# Altium PCB Nixie Valve Clock.PcbDoc (part 3 of 3)
Units mm, origin at the board's own origin, x right, y up, seen from the top; angles counter-clockwise.
Board outline 55 x 181 mm, 2 copper layers (Top Layer, Bottom Layer), stack 1.57 mm thick; 131 components, 140 nets, 506 pads, 541 vias.
Unrouted connection lines stored in the file: 104.
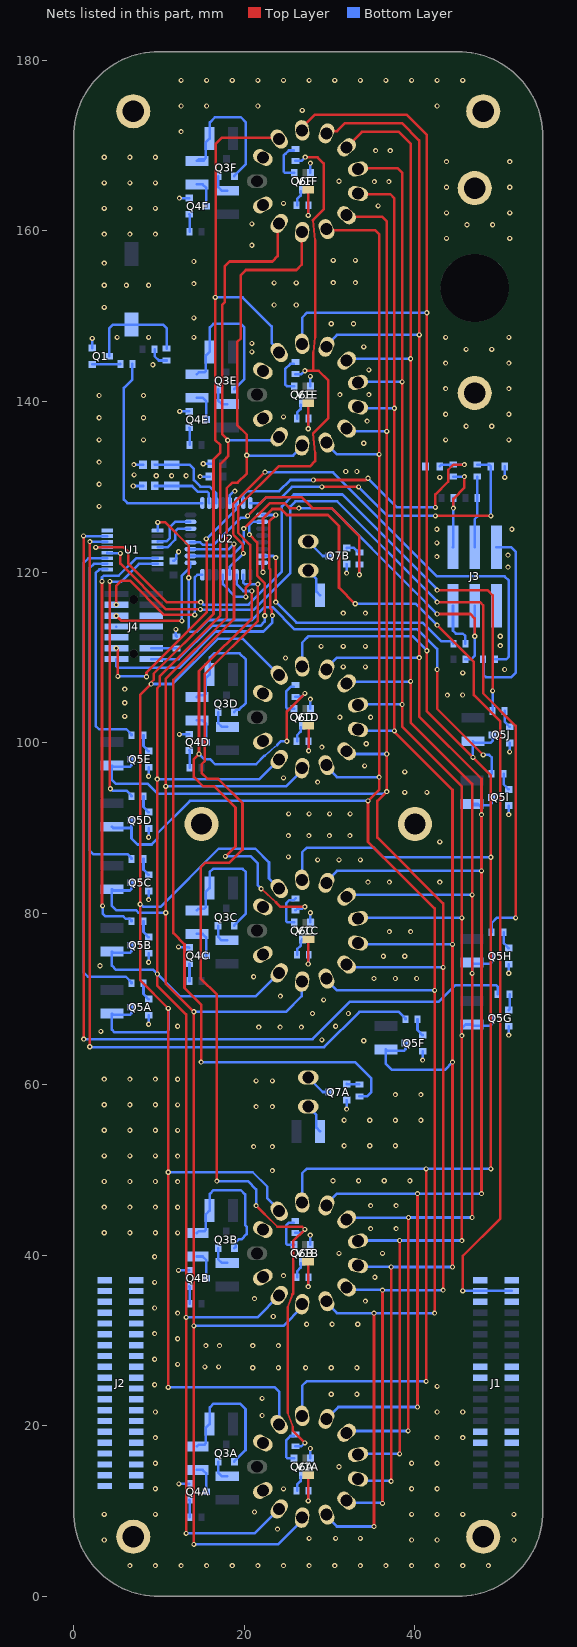
[diagram p2: the nets of this part, all layers, seen from the top]

## Via types
v1: diameter 0.6, hole 0.3, Top Layer to Bottom Layer, tented both sides, 541 vias

## Nets (pads, with @x,y where several pads share a name; then routed paths per layer and width w, separated by ;. In a path a pad name is that pad's centre, name@x,y a point inside that pad or via, vN(x,y) a via of type N, cw(c..) or ccw(c..) an arc to the next point about the centre after c; other vN are vias at no path point) (continued)
BCD2: U1.12 U2.30 | length 5.3
  Bottom Layer w0.3: U1.12@9.85,122.925 9.875,122.9 11,122.9 11.9,123.8 11.9,124.754 12.246,125.1 U2.30@13.7,125.1
BCD3: U1.11 U2.31 | length 5.6
  Bottom Layer w0.3: U1.11@9.85,123.575 9.875,123.6 10.9,123.6 11.3,124 11.3,125.3 11.9,125.9 U2.31@13.7,125.9
BUZZER: R8.1 U2.1 | length 25.7
  Bottom Layer w0.3: R8.1@6.9,144.4 6.9,142.6 5.9,141.6 5.9,128.5 6.3,128.1 U2.1@15.1,128.1
C_0: Q5A.3 R22A.1 V1A.0 V1B.0 V1C.0 V1D.0 V1E.0 V1F.0 | length 258.9
  Top Layer w0.3: v1(11.1,24.5) v1(11.1,49.7) v1(11.1,68.9) 7.8,72.2 v1(7.8,81.1) 7.8,105.602 v1(9.099,106.901) 9.157,106.958 9.157,107.157 9.399,107.399 9.399,108.109 16.4,115.11 16.4,133.2 17.2,134 17.2,134.9 16.6,135.5 v1(16.6,152.2) 16.65,152.25 16.65,170.15 17.409,170.909 23.922,170.909 V1F.0@24.092,170.738
  Bottom Layer w0.3: Q5A.3@6.797,69.039 6.797,68.339 6.597,68.139 4.647,68.139 R22A.1@4.497,68.289 4.497,66.425 4.821,66.1 10.874,66.1 11.157,66.384 11.157,68.843 v1(11.1,68.9) ; v1(7.8,81.1) 7.881,81.1 8.181,80.8 9.064,80.8 ; 9.065,80.8 10.2,80.8 17,87.6 21.3,87.6 22.9,86 22.9,84.13 V1C.0@24.092,82.938 ; v1(9.099,106.901) 11.598,106.901 16.897,112.2 19.83,112.2 V1D.0@24.092,107.938 ; v1(11.1,24.5) 23.6,24.5 24.1,24 24.1,20.146 V1A.0@24.092,20.138 ; v1(11.1,49.7) 21,49.7 22.7,48 22.7,46.632 24.092,45.24 V1B.0@24.092,45.138 ; v1(16.6,152.2) 19.8,152.2 23.2,148.8 23.2,146.874 24.092,145.982 V1E.0@24.092,145.738
C_1: Q5B.3 R22B.1 V1A.1 V1B.1 V1C.1 V1D.1 V1E.1 V1F.1 | length 236.9
  Top Layer w0.3: v1(13.2,7.4) v1(13.2,32.7) ; v1@13.2,32.619 13.2,68.2 9.8,71.6 9.8,72.925 9.8,95.746 v1(9.809,95.755) 9.8,95.764 9.8,106.4 10.099,106.698 10.099,107.799 17.2,114.9 17.2,132.7 17.9,133.4 18.104,133.604 v1@18.104,135.364 ; v1(18.062,135.462) 18.062,135.543 17.4,136.206 17.4,151.3 17.7,151.6 17.7,155.8 18.3,156.4 23.3,156.4 23.921,157.021 23.921,160.692 V1F.1@24.092,160.862 ; V1A.1@24.029,10.2 V1A.1@24.092,10.262
  Bottom Layer w0.3: Q5B.3@6.797,76.3 6.797,75.6 6.597,75.4 4.647,75.4 R22B.1@4.497,75.55 4.497,73.903 5,73.4 9.35,73.4 v1@9.775,72.975 ; v1(9.809,95.755) 9.814,95.75 21.779,95.75 V1D.1@24.092,98.062 ; v1(9.825,72.925) v1@9.775,72.975 ; v1(13.2,7.4) 21.229,7.4 V1A.1@24.092,10.262 ; v1(13.2,32.7) 21.529,32.7 V1B.1@24.092,35.262 ; v1(18.062,135.462) 23.692,135.462 V1E.1@24.092,135.862 ; V1C.1@24.092,73.062 21.329,70.3 12.45,70.3 v1@9.775,72.975
C_2: Q5C.3 R22C.1 V1A.2 V1B.2 V1C.2 V1D.2 V1E.2 V1F.2 | length 245.8
  Top Layer w0.3: v1(14.1,6.1) v1(14.1,31.7) v1(14.1,68.5) 10.8,71.8 10.8,107.5 17.95,114.65 17.95,129.85 18.6,130.5 19.235,130.5 20.3,131.565 v1(20.3,133.7) 20.3,136.1 19.2,137.2 19.2,147 19.6,147.4 19.6,154.8 20.2,155.4 26.1,155.4 26.741,156.041 26.741,159.808 V1F.2@26.777,159.844 ; V1A.2@26.777,8.982 V1A.2@26.777,9.244
  Bottom Layer w0.3: Q5C.3@6.797,83.608 6.797,82.908 6.597,82.708 4.647,82.708 R22C.1@4.497,82.858 4.497,80.903 5,80.4 7.298,80.4 7.597,80.1 8.774,80.1 v1(10.8,80.1) ; v1(10.8,94.9) 24.895,94.9 26.777,96.782 V1D.2@26.777,97.044 ; v1(14.1,6.1) 23.982,6.1 26.777,8.895 V1A.2@26.777,9.244 ; v1(14.1,31.7) 24.582,31.7 26.777,33.895 V1B.2@26.777,34.244 ; v1(14.1,68.5) 24.9,68.5 26.741,70.341 26.741,72.008 V1C.2@26.777,72.044 ; v1(20.3,133.7) 20.35,133.65 25.713,133.65 26.777,134.713 V1E.2@26.777,134.844
C_3: Q5D.3 R22D.1 V1A.3 V1B.3 V1C.3 V1D.3 V1E.3 V1F.3 | length 242.5
  Top Layer w0.3: V1F.3@29.628,160.19 29.734,160.083 35.317,160.083 35.8,159.6 v1(35.8,133.8) v1(35.8,96) 35.8,94.5 v1(34.5,93.2) 34.5,88.4 42.3,80.6 v1(42.3,71) v1(42.3,33.2) ; v1(35.2,8.2) v1(35.2,33.2)
  Bottom Layer w0.3: R22D.1@4.497,90.188 4.654,90.03 6.776,90.03 6.797,90.01 ; Q5D.3@6.797,90.938 6.797,90.238 6.797,90.03 6.797,88.803 7.5,88.1 9.149,88.1 9.797,88.748 9.797,89.36 13.637,93.2 v1(34.5,93.2) ; V1A.3@29.628,9.416 30.843,8.2 v1(35.2,8.2) ; V1B.3@29.628,34.416 30.843,33.2 v1(35.2,33.2) v1(42.3,33.2) ; V1C.3@29.628,72.216 30.843,71 v1(42.3,71) ; V1D.3@29.628,97.216 30.843,96 v1(35.8,96) ; V1E.3@29.628,135.19 29.628,135.016 30.843,133.8 v1(35.8,133.8)
C_4: Q5E.3 R22E.1 V1A.4 V1B.4 V1C.4 V1D.4 V1E.4 V1F.4 | length 232.1
  Top Layer w0.3: V1F.4@31.991,161.821 32.19,161.622 36.178,161.622 36.7,161.1 v1(36.7,136.5) v1(36.7,94.3) 35.6,93.2 35.6,88.9 43.3,81.2 v1(43.3,73.7) v1(43.3,35.9) ; v1(36.2,10.9) v1(36.2,35.9)
  Bottom Layer w0.3: Q5E.3@6.797,98.095 6.797,97.395 6.597,97.195 4.647,97.195 R22E.1@4.497,97.345 4.497,95.66 4.957,95.2 8.703,95.2 9.853,94.05 36.389,94.05 36.639,94.3 v1(36.7,94.3) ; V1D.4@31.991,99.021 32.312,98.7 v1(36.7,98.7) ; V1E.4@31.991,136.821 32.312,136.5 v1(36.7,136.5) ; V1C.4@32.312,73.7 v1(43.3,73.7) ; V1A.4@32.37,10.957 36.143,10.957 v1(36.2,10.9) ; V1B.4@32.369,35.957 36.143,35.957 v1(36.2,35.9) v1(43.3,35.9)
C_5: Q5F.3 R22F.1 V1A.5 V1B.5 V1C.5 V1D.5 V1E.5 V1F.5 | length 204.7
  Top Layer w0.3: V1F.5@33.326,164.364 33.397,164.292 37.108,164.292 37.6,163.8 v1(37.6,101.4) ; v1(37.2,13.5) v1(37.2,38.6) ; v1@37.6,101.3 44.4,94.5 v1(44.4,38.6)
  Bottom Layer w0.3: V1E.5@33.326,139.364 33.49,139.2 v1(37.6,139.2) ; V1A.5@33.49,13.6 33.532,13.557 37.143,13.557 v1(37.2,13.5) ; V1B.5@33.49,38.6 33.536,38.646 37.154,38.646 v1(37.2,38.6) v1(44.4,38.6) ; V1C.5@33.49,76.4 v1(44.4,76.4) ; V1D.5@33.49,101.4 v1(37.6,101.4) ; R22F.1@36.597,64.081 36.6,64.077 36.747,63.931 38.697,63.931 38.897,64.131 Q5F.3@38.897,64.831 ; R22F.1@36.6,63.931 36.6,62.4 37.3,61.7 43.5,61.7 v1(44.4,62.6)
C_6: Q5G.3 R22G.1 V1A.6 V1B.6 V1C.6 V1D.6 V1E.6 V1F.6 | length 203.1
  Top Layer w0.3: V1F.6@33.326,167.236 33.397,167.307 37.993,167.307 38.5,166.8 v1(38.5,142.3) v1(38.5,104.5) 38.5,101.9 45.5,94.9 v1(45.5,79.5) v1(45.5,65.7) v1(45.5,41.7) ; v1(38.2,16.7) v1(38.2,41.704)
  Bottom Layer w0.3: V1E.6@33.326,142.236 33.394,142.304 38.496,142.304 v1(38.5,142.3) ; V1B.6@33.394,41.704 v1(38.2,41.704) v1@45.496,41.704 ; V1C.6@33.394,79.504 45.496,79.504 v1(45.5,79.5) ; V1D.6@33.394,104.504 v1@38.496,104.504 ; V1A.6@33.397,16.7 33.401,16.704 38.196,16.704 v1(38.2,16.7) ; v1(45.5,65.7) 45.5,66.587 45.925,67.012 R22G.1@46.697,67.012 46.847,66.862 48.797,66.862 48.997,67.062 Q5G.3@48.997,67.762
C_7: Q5H.3 R22H.1 V1A.7 V1B.7 V1C.7 V1D.7 V1E.7 V1F.7 | length 218.6
  Top Layer w0.3: V1F.7@31.991,169.779 33.799,171.586 38.114,171.586 39.5,170.2 39.5,102.4 46.7,95.2 v1(46.7,82.2) v1(46.7,73) 46.7,46.8 v1(46.7,44.4) ; v1(39.2,19.4) 39.224,19.424 39.224,44.377 v1(39.248,44.401)
  Bottom Layer w0.3: V1C.7@31.991,81.979 V1C.7@32.147,82.134 ; V1D.7@31.991,106.979 V1D.7@32.3,107.287 ; V1E.7@31.991,144.779 32.201,144.989 39.489,144.989 v1(39.5,145) ; V1A.7@32.201,19.389 39.189,19.389 v1(39.2,19.4) ; V1B.7@32.202,44.389 39.237,44.389 v1(39.248,44.401) ; V1C.7@32.201,82.189 46.689,82.189 v1(46.7,82.2) ; V1D.7@32.201,107.189 v1@39.489,107.189 ; v1(39.248,44.401) 46.677,44.4 v1@46.689,44.389 ; R22H.1@46.697,74.266 R22H.1@46.7,74.263 ; v1(46.7,73) R22H.1@46.7,74.263 ; Q5H.3@48.997,75.016 48.997,74.316 48.797,74.116 46.847,74.116 R22H.1@46.7,74.263
  other v1: 39.5,107.2
C_8: Q5I.3 R22I.1 V1A.8 V1B.8 V1C.8 V1D.8 V1E.8 V1F.8 | length 240.6
  Top Layer w0.3: V1F.8@29.628,171.41 29.891,171.673 30.873,171.673 31.8,172.6 38.5,172.6 40.5,170.6 40.5,103.1 47.8,95.8 v1(47.8,91.6) v1(47.8,85) v1(47.8,47.2) ; v1(40.3,22.2) v1(40.3,47.2)
  Bottom Layer w0.3: V1A.8@29.628,20.81 31.018,22.2 v1(40.3,22.2) ; V1B.8@29.628,45.984 30.844,47.2 v1(40.3,47.2) v1(47.8,47.2) ; V1C.8@29.628,83.61 29.628,83.784 30.844,85 v1(47.8,85) ; V1D.8@29.628,108.784 30.844,110 v1(40.5,110) ; V1E.8@29.628,146.41 29.628,146.584 30.844,147.8 v1(40.5,147.8) ; v1(47.8,91.6) 47.8,92.43 R22I.1@47.525,92.705 ; Q5I.3@48.997,93.605 48.997,92.905 48.797,92.705 R22I.1@47.525,92.705 ; R22I.1@47.525,92.705 47.375,92.855 R22I.1@46.697,92.855 46.847,92.705 R22I.1@47.525,92.705
C_9: Q5J.3 R22J.1 V1A.9 V1B.9 V1C.9 V1D.9 V1E.9 V1F.9 | length 277.1
  Top Layer w0.3: V1F.9@26.777,171.756 26.777,172.077 28.3,173.6 39,173.6 41.4,171.2 v1(41.4,150.4) v1(41.4,110.8) 41.4,103.7 v1(46.8,98.3) 48.9,96.2 v1(48.9,86.6) v1(48.9,50.1) ; v1(41.3,25.2) v1(41.3,50.1)
  Bottom Layer w0.3: V1A.9@26.777,21.156 26.8,21.179 26.8,24.7 27.3,25.2 v1(41.3,25.2) ; V1B.9@26.777,46.156 26.8,46.179 26.8,49.6 27.3,50.1 v1(41.3,50.1) v1(48.9,50.1) ; V1C.9@26.777,83.956 26.8,83.979 26.8,87.2 27.3,87.7 35.2,87.7 36.3,86.6 v1(48.9,86.6) ; V1D.9@26.777,108.956 26.8,108.979 26.8,111.756 27.381,112.337 27.381,112.339 27.542,112.5 39.7,112.5 v1(41.4,110.8) ; V1E.9@26.777,146.756 26.8,146.779 26.8,149.829 27.371,150.4 v1(41.4,150.4) ; v1(46.8,98.3) 46.797,98.303 R22J.1@46.797,100.191 46.947,100.041 48.897,100.041 49.097,100.241 Q5J.3@49.097,100.941
CS_0: R23A.1 U1.3 | length 57.1
  Bottom Layer w0.3: U1.3@3.95,121.625 1.725,121.625 1.2,121.1 1.2,73.1 1.698,72.602 6.133,72.602 6.797,71.939 R23A.1@6.797,71.839
CS_1: R23B.1 U1.14 | length 50.7
  Top Layer w0.3: v1(3.338,118.924) 3.338,81.043 3.4,80.981 v1(3.4,80.9)
  Bottom Layer w0.3: v1(3.338,118.924) 3.338,119.398 3.54,119.6 5.3,119.6 7.325,121.625 U1.14@9.85,121.625 ; v1(3.4,80.9) 3.4,80 3.7,79.7 5.8,79.7 6.099,79.4 6.597,79.4 6.797,79.2 R23B.1@6.797,79.1
CS_2: R23C.1 U1.2 | length 40.7
  Bottom Layer w0.3: U1.2@3.95,120.975 2.375,120.975 1.9,120.5 1.9,87.4 2.367,86.933 6.372,86.933 6.797,86.508 R23C.1@6.797,86.408
CS_3: R23D.1 U1.15 | length 33.7
  Top Layer w0.3: v1(4.264,118.918) 4.264,94.895 4.264,94.683 v1(4.321,94.626)
  Bottom Layer w0.3: v1(4.264,118.918) 4.282,118.9 5.6,118.9 7.675,120.975 U1.15@9.85,120.975 ; v1(4.321,94.626) 4.396,94.626 4.632,94.39 6.245,94.39 6.797,93.838 R23D.1@6.797,93.738
CS_4: R23E.1 U1.1 | length 24.1
  Bottom Layer w0.3: U1.1@3.95,120.325 3.025,120.325 2.6,119.9 2.6,102 3,101.6 6.191,101.6 6.797,100.995 R23E.1@6.797,100.895
CS_5: R23F.1 U1.6 | length 100.4
  Top Layer w0.3: v1(1.9,64.4) 1.912,64.413 1.912,123.563 v1(1.925,123.575)
  Bottom Layer w0.3: v1(1.9,64.4) 1.95,64.35 29.35,64.35 33.5,68.5 38.127,68.5 38.897,67.731 R23F.1@38.897,67.631 ; v1(1.925,123.575) U1.6@3.95,123.575
CS_6: R23G.1 U1.7 | length 113.8
  Top Layer w0.3: v1(1.174,124.244) 1.187,124.231 1.187,65.313 v1(1.2,65.3)
  Bottom Layer w0.3: v1@1.193,124.225 U1.7@3.95,124.225 ; v1(1.2,65.3) 28,65.3 32.4,69.7 42.8,69.7 44.7,71.6 49.535,71.6 49.697,71.439 R23G.1@49.697,70.562
CS_7: R23H.1 U1.4 | length 104.8
  Top Layer w0.3: v1(5.5,122.2) 5.5,121 10.852,115.648 v1(14.868,115.648) ; v1(42.6,116.5) 47.6,116.5 48,116.1 48,105.8 51.8,102 v1(51.8,79.5)
  Bottom Layer w0.3: U1.4@3.95,122.275 3.988,122.237 5.462,122.237 v1(5.5,122.2) ; v1(14.868,115.648) 14.925,115.591 21.091,115.591 25.4,119.9 25.4,127.7 26,128.3 30.9,128.3 42.45,116.75 42.45,116.731 42.6,116.581 v1(42.6,116.5) ; R23H.1@48.997,77.816 48.997,78.926 49.571,79.5 v1(51.8,79.5)
CS_8: R23I.1 U1.9 | length 65.7
  Top Layer w0.3: v1(9.864,125.833) 10.767,125.833 13.5,123.1 v1(13.5,119.35) ; v1(42.6,108.6) 42.6,104 v1(48,98.6)
  Bottom Layer w0.3: U1.9@9.85,124.875 9.85,125.82 v1(9.864,125.833) ; v1(13.5,119.35) 13.5,113.2 13.7,113 14.4,113 15.8,114.4 20.9,114.4 22.4,115.9 23.3,115.9 25.9,113.3 40.3,113.3 42.6,111 v1(42.6,108.6) ; v1(48,98.6) 48.7,98.6 49,98.3 49,96.409 R23I.1@48.997,96.405
CS_9: R23J.1 U1.5 | length 79.8
  Top Layer w0.3: v1(2.6,122.9) 2.625,122.925 5.875,122.925 6.4,122.4 6.4,121 10.9,116.5 v1(14.9,116.5) ; v1(42.6,117.9) 48.5,117.9 49.1,117.3 v1(49.1,106.1)
  Bottom Layer w0.3: v1(2.6,122.9) 2.625,122.925 U1.5@3.95,122.925 ; v1(14.9,116.5) 14.911,116.5 15.211,116.2 20.5,116.2 24.4,120.1 24.4,127.7 25.8,129.1 31.5,129.1 42.45,118.15 42.45,118.131 42.6,117.981 v1(42.6,117.9) ; R23J.1@49.097,103.741 49.098,103.743 49.098,106.098 v1(49.1,106.1)
ENC_GRN_LED: R11.2 U2.20 | length 59.2
  Top Layer w0.3: v1(19.9,122.2) 19.85,122.25 19.85,123.25 18.7,124.4 18.7,127.99 v1(22.436,131.725)
  Bottom Layer w0.3: U2.20@18.3,119.7 18.3,120.6 v1(19.9,122.2) ; v1(22.436,131.725) 22.461,131.7 30.4,131.7 42.6,119.5 50.5,119.5 51,119 51,110.1 50.7,109.8 R11.2@49.4,109.8
ENC_GRN_LED_J: J3.5 R11.1 | length 22.6
  Bottom Layer w0.3: R11.1@48,109.8 48.031,109.769 48.031,107.969 48.3,107.7 51.3,107.7 51.8,108.2 51.8,122.4 51.27,122.93 J3.5@49.54,122.93
ENC_RED_LED: R10.2 U2.15 | length 29.8
  Top Layer w0.3: v1(23.7,116.5) v1(23.7,121.7)
  Bottom Layer w0.3: U2.15@22.1,121.9 23.419,121.9 23.619,121.7 v1(23.7,121.7) ; v1(23.7,116.5) 26.1,114.1 40.9,114.1 43.102,111.898 44.3,111.898 44.5,111.698 R10.2@44.5,111.6
ENC_RED_LED_J: J3.2 R10.1 | length 5.5
  Bottom Layer w0.3: J3.2@44.46,116.07 44.46,113.14 44.8,112.8 45.6,112.8 45.9,112.5 R10.1@45.9,111.6
ENC_SW: J3.4 R2.1 U2.26 | length 51.7
  Top Layer w0.3: v1(19.95,125.1) 20,125.1 23,128.1 24.7,128.1 25.3,127.5 v1(26.4,127.5) ; v1(42.6,115.1) 46.5,115.1 47,114.6 v1(47,112.5)
  Bottom Layer w0.3: U2.26@13.7,121.9 18.5,121.9 19.95,123.35 v1(19.95,125.1) ; v1(26.4,127.5) 30.2,127.5 39.8,117.9 v1(42.6,115.1) ; R2.1@45.9,109.8 46.6,109.8 47,110.2 v1(47,112.5) J3.4@47,116.07
ENCDR_A: J3.1 R1.1 R3.2 | length 11.3
  Top Layer w0.3: v1(44.5,127.5) 44.5,128.6 45.8,129.9 v1(45.8,131.2)
  Bottom Layer w0.3: J3.1@44.46,122.93 44.5,122.97 v1(44.5,127.5) R1.1@44.5,128.7 ; R3.2@44.5,131.2 v1(45.8,131.2)
ENCDR_A_FILT: C2.1 R3.1 U2.7 | length 35.8
  Top Layer w0.3: v1(28.1,130.8) 34.219,130.8 34.419,131 v1(34.5,131) ; v1(42.4,127.6) 42.4,129.1 43.9,130.6 43.9,132 44.5,132.6 v1(45.8,132.6)
  Bottom Layer w0.3: U2.7@19.9,128.1 19.9,129.1 20.3,129.5 24.1,129.5 25.4,130.8 v1(28.1,130.8) ; v1(34.5,131) 37.9,127.6 v1(42.4,127.6) ; C2.1@42.9,132.4 43.1,132.6 R3.1@44.5,132.6 v1(45.8,132.6)
ENCDR_B: J3.3 R4.2 R5.2 | length 8.4
  Bottom Layer w0.3: J3.3@47,122.93 47,126.2 47.3,126.5 R5.2@47.3,128.7 R4.2@47.3,131.2
ENCDR_B_FILT: C3.2 R4.1 U2.8 | length 37.9
  Top Layer w0.3: v1(29.1,130) v1(33.4,130) ; v1(42.4,126.6) v1(48.9,126.6)
  Bottom Layer w0.3: U2.8@20.7,128.1 21.9,128.1 22.6,128.8 24.4,128.8 25.6,130 v1(29.1,130) ; v1(33.4,130) 36.8,126.6 v1(42.4,126.6) ; R4.1@47.3,132.6 48.675,132.6 48.887,132.388 48.887,126.613 v1(48.9,126.6)
FAULT: J1.37 J1.38 U2.16 | length 126.8
  Top Layer w0.3: v1(22.2,120) 22.2,126.3 23.3,127.4 24.3,127.4 25,126.7 29.8,126.7 31.1,125.4 31.1,118.2 v1(33,116.3) ; v1(42.6,113.8) 46.9,109.5 46.9,105.6 50,102.5 50,44.3 45.6,39.9 v1(45.6,35.8)
  Bottom Layer w0.3: U2.16@22.1,121.1 22.1,120.181 22.2,120.081 v1(22.2,120) ; v1(33,116.3) 40.1,116.3 v1(42.6,113.8) ; v1(45.6,35.8) 45.602,35.798 51.339,35.798 J1.37@51.342,35.795
GND: C1.2 C2.2 C3.1 C4.2 C5.2 C6.2 C7.2 J1.9 J1.10 J1.11 J1.12 J1.21 J1.22 J1.23 J1.24 J1.35 J1.36 J1.39 J1.40 J2.1 J2.2 J2.3 J2.4 J2.5 J2.6 J2.7 J2.8 J2.9 J2.10 J2.11 J2.12 J2.13 J2.14 J2.15 J2.16 J2.17 J2.18 J2.19 J2.20 J2.21 J2.22 J2.23 J2.24 J2.25 J2.26 J2.27 J2.28 J2.29 J2.30 J2.31 J2.32 J2.33 J2.34 J2.35 J2.36 J2.37 J2.38 J2.39 J2.40 J3.6 J4.5 J4.7 pad.1 pad.2 pad.3 pad.4 pad.5 pad.6 pad.7@40,90.5 pad.8 Q1.2 Q4A.2 Q4B.2 Q4C.2 Q4D.2 Q4E.2 Q4F.2 Q5A.2 Q5B.2 Q5C.2 Q5D.2 Q5E.2 Q5F.2 Q5G.2 Q5H.2 Q5I.2 Q5J.2 Q6A.2 Q6B.2 Q6C.2 Q6D.2 Q6E.2 Q6F.2 Q7A.2 Q7B.2 R9.1 U1.8 U2.5 | length 37.3
  Bottom Layer w0.3: Q1.2@2.2,146.25 v1(2.2,147.4) ; v1(6.993,130.1) C7.2@8.15,130.1 ; v1(7.081,132.597) 8.147,132.597 C6.2@8.15,132.6 ; v1(8.797,67.039) Q5A.2@8.797,68.089 ; v1(8.797,74.3) Q5B.2@8.797,75.35 ; Q5C.2@8.797,82.658 8.8,82.655 v1(8.8,81.65) ; v1(8.797,88.95) Q5D.2@8.797,89.988 ; v1(8.797,96.095) Q5E.2@8.797,97.145 ; C1.2@11.7,121.325 11.775,121.325 12.025,121.575 12.025,122.025 12.31,122.309 v1(12.31,122.39) ; v1(12,113.3) 12,112.542 R9.1@12.075,112.467 ; v1(12.3,38.2) 12.313,38.213 13.54,38.213 Q4B.2@13.553,38.226 ; v1(12.3,76.1) 12.34,76.06 13.501,76.06 Q4C.2@13.541,76.02 ; v1(12.35,13.2) 12.361,13.211 13.542,13.211 Q4A.2@13.553,13.223 ; v1(12.4,101) 12.412,101.012 13.546,101.012 Q4D.2@13.558,101.024 ; v1(12.409,163.829) 12.41,163.827 13.557,163.827 Q4F.2@13.559,163.825 ; v1(12.446,138.838) 12.449,138.835 13.551,138.835 Q4E.2@13.554,138.832 ; v1(14.838,131.197) 15.947,131.197 C4.2@15.95,131.2 ; v1(15.2,132.7) C5.2@16.25,132.7 ; U2.5@18.3,128.1 18.3,128.981 18.819,129.5 v1(18.9,129.5) ; Q6B.2@27.741,41.2 v1(27.74,42.335) ; Q6D.2@27.747,103.997 v1@27.747,105.131 ; Q6A.2@27.749,16.201 v1(27.747,17.337) ; Q6F.2@27.75,166.798 v1@27.75,167.932 ; Q6E.2@27.751,141.8 v1@27.751,142.934 ; v1(27.757,80.107) 27.758,80.106 27.758,78.972 Q6C.2@27.76,78.971 ; v1(32,57.1) Q7A.2@32,58.15 ; v1(32,119.9) Q7B.2@32,120.95 ; v1(40.897,62.831) Q5F.2@40.897,63.881 ; v1(50.525,131.1) C3.1@50.525,132.4 ; v1(50.997,65.762) Q5G.2@50.997,66.812 ; v1(50.997,73.016) Q5H.2@50.997,74.066 ; v1(50.997,91.605) Q5I.2@50.997,92.655 ; v1(51.097,98.941) Q5J.2@51.097,99.991
  other v1: 6.601,3.615 9.601,3.615 12.601,3.615 15.601,3.615 18.601,3.615 21.601,3.615 24.601,3.615 27.601,3.615 30.601,3.615 33.601,3.615 36.601,3.615 39.601,3.615 42.601,3.615 45.601,3.615 48.601,3.615 3.601,6.615 39.601,6.615 42.601,6.615 51.601,6.615 27.6,6.8 30.7,6.8 33.6,6.8 23.9,7.9 3.601,9.615 9.601,9.615 39.601,9.615 42.601,9.615 45.601,9.615 51.601,9.615 21.2,9.9 24.6,12.6 9.601,12.615 39.601,12.615 42.601,12.615 31.1,15.2 9.601,15.615 39.601,15.615 42.601,15.615 9.601,18.615 42.601,18.615 45.601,18.615 22.1,21.2 9.601,21.615 42.601,21.615 45.601,21.615 22.1,23.2 30.2,23.7 33.2,23.7 42.601,24.615 9.5,24.8 21,26.8 24,26.8 27.2,26.8 30.2,26.8 33.2,26.8 15.4,26.9 17,26.9 12.2,27.2 9.5,27.8 15.5,29.4 17.1,29.4 21,29.4 24,29.4 12.2,30.2 9.5,30.8 27.3,31.9 30.3,31.9 33.3,31.9 23.4,32.8 12.2,33.2 9.5,33.8 34.2,34.6 21.2,34.9 9.5,36.8 35.3,37.4 24.6,37.6 9.5,39.8 31.1,40.2 36.2,40.2 12.2,42.6 3.601,42.615 6.601,42.615 9.601,42.615 34.8,43.1 37.8,43.1 12.2,45.6 3.601,45.615 6.601,45.615 9.601,45.615 34.8,45.8 37.8,45.8 12.2,48.6 3.601,48.615 6.601,48.615 9.601,48.615 30.4,48.7 33.4,48.7 36.4,48.7 39.4,48.7 23.3,49.9 12.2,51.6 3.601,51.615 6.601,51.615 9.601,51.615 21.1,52.7 23.3,52.7 31.7,52.8 34.7,52.8 37.7,52.8 3.601,54.615 6.601,54.615 9.601,54.615 12.2,54.6 31.7,55.8 34.7,55.8 37.7,55.8 40.7,55.8 21.4,57.4 23.3,57.4 3.601,57.615 6.601,57.615 9.601,57.615 12.2,57.6 37.7,58.8 40.7,58.8 21.4,60.4 23.3,60.4 3.601,60.615 6.601,60.615 9.601,60.615 12.2,60.6 34,65.1 29.1,65.2 3.2,66.2 21.7,66.7 24.2,66.7 26.7,66.7 12.2,66.8 30.7,66.8 28,68.3 32.2,68.3 29.3,69.9 24.241,70.341 35.2,72.4 37.7,72.4 40.2,72.4 21.1,72.6 3.1,73.9 36.3,75 38.8,75 37,77.9 39.5,77.9 34.5,83.7 37,83.7 42.9,83.7 28.6,86.3 31.1,86.3 33.6,86.3 25.171,86.644 42.9,88.4 25.171,89.144 27.571,89.144 29.971,89.144 32.371,89.144 25.198,91.691 27.598,91.691 29.998,91.691 32.398,91.691 38.8,94.2 41.4,94.2 28.6,95.4 24.6,95.9 38.8,96.6 34.1,97.3 29.1,99.5 34.3,99.9 31.2,103 34.8,103 6,103.1 6,104.7 27.745,105.132 43.8,105.6 45.587,105.61 6,106.3 45.6,108.2 50.5,108.6 31.6,108.9 34.2,108.9 24.838,109.947 29,111.3 31.6,111.3 34.2,111.3 50,111.4 50,112.5 31.6,115.2 34.2,115.2 50.9,120.6 42.573,121.827 50.9,122 42.573,123.427 42.573,125.027 51.352,125.033 3,127.7 3,130.3 42.9,131.1 9.7,131.3 11.5,131.3 13.2,131.3 7.1,131.4 31.9,131.8 33.2,131.8 3,132.9 34,135.1 3,135.5 8.2,135.5 43.6,135.5 51,135.5 46,137.1 49,137.1 34.4,137.7 3,138.1 8.2,138.1 24.6,138.2 43.6,138.5 51,138.5 3,140.7 8.2,140.7 31.2,140.8 34.6,140.8 43.6,141.5 51,141.5 27.749,142.935 34.6,143.7 9.3,144.3 43.6,144.5 51,144.5 20.9,145.8 46,146.1 49,146.1 34,146.4 20.9,146.8 5.1,147.5 8.8,147.5 14.1,147.5 43.6,147.5 51,147.5 30.2,149.1 32.8,149.1 14.1,149.8 3.601,151.015 23.5,151.3 26.1,151.3 3.601,153.615 6.201,153.615 8.801,153.615 14.1,153.8 23.5,153.9 26.1,153.9 30.427,153.927 33.027,153.927 3.601,156.215 14.1,156.4 30.427,156.527 33.027,156.527 20.9,158.3 43.7,159.1 51.1,159.1 3.601,159.615 6.601,159.615 9.601,159.615 46.1,160.7 49.1,160.7 20.9,160.8 43.7,162.1 51.1,162.1 3.601,162.615 6.601,162.615 9.601,162.615 35.685,162.915 24.6,163.2 43.7,165.1 51.1,165.1 3.601,165.615 6.601,165.615 9.601,165.615 35.248,165.761 36.948,165.761 31.1,165.8 27.748,167.933 43.7,168.1 51.1,168.1 3.601,168.615 6.601,168.615 9.601,168.615 35.401,169.398 37.101,169.398 12.601,171.615 26.8,174.1 12.601,174.615 15.601,174.615 21.601,174.615 42.601,174.615 12.601,177.615 15.601,177.615 18.601,177.615 21.601,177.615 24.601,177.615 27.601,177.615 30.601,177.615 33.601,177.615 36.601,177.615 39.601,177.615 42.601,177.615 45.601,177.615
GNDDetect: J4.11 R9.2 | length 3
  Bottom Layer w0.3: J4.11@9.1,111.09 9.112,111.078 12.064,111.078 R9.2@12.075,111.067
IN-3_CATHODE_0: Q7A.3 V2A.2 | length 3.2
  Bottom Layer w0.3: V2A.2@27.5,60.8 29.2,59.1 Q7A.3@30,59.1
IN-3_CATHODE_1: Q7B.3 V2B.2 | length 3.2
  Bottom Layer w0.3: V2B.2@27.5,123.6 29.2,121.9 Q7B.3@30,121.9
IN-3_SW_0: R27A.1 U2.27 | length 94.3
  Top Layer w0.3: v1(14.95,62.6) 14.95,69.35 13,71.3 13,76.404 11.7,77.704 11.7,107.4 18.8,114.5 v1(18.8,123.3)
  Bottom Layer w0.3: U2.27@13.7,122.7 18.2,122.7 v1(18.8,123.3) ; v1(14.95,62.6) 33,62.6 34.9,60.7 34.9,59.1 34.4,58.6 R27A.1@33.5,58.6
IN-3_SW_1: R27B.1 U2.28 | length 29.8
  Top Layer w0.3: v1(20.4,126.6) 22.6,128.8 26.7,128.8 28,127.5 30.2,127.5 33.5,124.2 v1(33.5,119.7)
  Bottom Layer w0.3: U2.28@13.7,123.5 14.846,123.5 15.146,123.2 16.4,123.2 19.6,126.4 20.2,126.4 v1(20.4,126.6) ; v1(33.5,119.7) R27B.1@33.5,120.9
LDPA: V1A.LDP
LDPB: V1B.LDP
LDPC: V1C.LDP
LDPD: V1D.LDP
LDPE: V1E.LDP
LDPF: V1F.LDP
NetB1_-: B1.- Q1.3 R7.1 | length 12.7
  Bottom Layer w0.3: Q1.3@4.2,145.3 4.2,148.6 4.6,149 B1.-@6.8,149 10.5,149 10.9,148.6 R7.1@10.9,146.2
NetC6_1: C6.1 U2.3 X1.1 | length 10.5
  Bottom Layer w0.3: C6.1@9.5,132.6 X1.1@11.5,132.6 13.6,132.6 14.1,132.1 14.1,130.8 14.88,130.02 15.946,130.02 16.7,129.266 U2.3@16.7,128.1
NetC7_1: C7.1 U2.2 X1.2 | length 7.9
  Bottom Layer w0.3: C7.1@9.5,130.1 X1.2@11.5,130.1 13.9,130.1 14.58,129.42 15.68,129.42 15.852,129.248 15.852,128.148 U2.2@15.9,128.1
NetD3A_1: D3A.1 R24A.2 | length 4.2
  Top Layer w0.3: v1(27.5,11.2) D3A.1@27.5,14.225
  Bottom Layer w0.3: v1(27.5,11.2) 27.525,11.225 27.525,12.375 R24A.2@27.5,12.4
NetD3B_1: D3B.1 R24B.2 | length 4
  Top Layer w0.3: D3B.1@27.493,39.224 27.5,39.216 v1(27.5,36.3)
  Bottom Layer w0.3: v1(27.5,36.3) 27.521,36.321 27.521,37.37 R24B.2@27.5,37.391
NetD3C_1: D3C.1 R24C.2 | length 4
  Top Layer w0.3: v1(27.5,74.1) 27.5,76.986 D3C.1@27.51,76.996
  Bottom Layer w0.3: v1(27.5,74.1) 27.53,74.13 27.53,75.151 R24C.2@27.51,75.171
NetD3D_1: D3D.1 R24D.2 | length 4
  Top Layer w0.3: D3D.1@27.498,102.021 27.548,101.97 v1(27.548,99.084)
  Bottom Layer w0.3: v1(27.548,99.084) R24D.2@27.548,100.145
NetD3E_1: D3E.1 R24E.2 | length 4.2
  Top Layer w0.3: v1(27.5,136.8) 27.5,139.821 D3E.1@27.502,139.824
  Bottom Layer w0.3: v1(27.5,136.8) 27.526,136.826 27.526,137.975 R24E.2@27.502,137.999
NetD3F_1: D3F.1 R24F.2 | length 4.2
  Top Layer w0.3: v1(27.5,161.8) 27.5,164.82 D3F.1@27.501,164.822
  Bottom Layer w0.3: v1(27.5,161.8) 27.526,161.826 27.526,162.972 R24F.2@27.501,162.997
NetQ1_1: Q1.1 R8.2 | length 3.3
  Bottom Layer w0.3: Q1.1@2.2,144.35 2.225,144.375 5.475,144.375 R8.2@5.5,144.4
NetQ3A_1: Q3A.1 R18A.1 R19A.2 | length 16.9
  Bottom Layer w0.3: R19A.2@14.453,17.581 14.672,17.8 15.343,17.8 15.512,17.969 15.512,19.778 R18A.1@15.937,20.203 ; R18A.1@15.97,20.203 15.97,22.161 16.412,22.603 19.512,22.603 20.15,21.966 20.15,17.15 18.85,15.85 Q3A.1@18.85,15.8
NetQ3A_2: Q3A.2 R20A.2 | length 2.5
  Bottom Layer w0.3: Q3A.2@16.95,15.8 16.95,14.503 17.375,14.078 R20A.2@18.012,14.078
NetQ3B_1: Q3B.1 R18B.1 R19B.2 | length 17.3
  Bottom Layer w0.3: R19B.2@14.453,42.584 14.672,42.803 15.343,42.803 15.512,42.972 15.512,44.782 R18B.1@15.937,45.207 ; R18B.1@15.97,45.207 15.97,47.164 16.412,47.607 19.593,47.607 20.1,47.1 20.1,43.5 20.274,43.326 20.274,42.456 19.659,41.841 19.341,41.841 18.992,41.492 18.992,40.945 Q3B.1@18.85,40.803
NetQ3B_2: Q3B.2 R20B.2 | length 2.5
  Bottom Layer w0.3: Q3B.2@16.95,40.803 16.95,39.507 17.375,39.082 R20B.2@18.012,39.082
NetQ3C_1: Q3C.1 R18C.1 R19C.2 | length 16.9
  Bottom Layer w0.3: R19C.2@14.441,80.378 14.66,80.597 15.331,80.597 15.5,80.766 15.5,82.575 R18C.1@15.925,83 ; R18C.1@15.957,83 15.957,84.857 16.354,85.254 19.81,85.254 20.2,84.865 20.2,80.009 18.838,78.647 Q3C.1@18.838,78.597
NetQ3C_2: Q3C.2 R20C.2 | length 2.5
  Bottom Layer w0.3: Q3C.2@16.938,78.597 16.938,77.3 17.363,76.875 R20C.2@18,76.875
NetQ3D_1: Q3D.1 R18D.1 R19D.2 | length 17.3
  Bottom Layer w0.3: R19D.2@14.458,105.382 14.677,105.601 15.348,105.601 15.517,105.77 15.517,107.579 R18D.1@15.942,108.004 ; R18D.1@15.974,108.004 15.974,110.004 16.47,110.5 19.457,110.5 20.2,109.757 20.2,104.7 19.401,103.901 19.104,103.901 18.854,103.651 Q3D.1@18.854,103.601
NetQ3D_2: Q3D.2 R20D.2 | length 2.5
  Bottom Layer w0.3: Q3D.2@16.954,103.601 16.954,102.304 17.379,101.879 R20D.2@18.017,101.879
NetQ3E_1: Q3E.1 R18E.1 R19E.2 | length 18.6
  Bottom Layer w0.3: R19E.2@14.454,143.19 14.674,143.409 15.345,143.409 15.514,143.578 15.514,145.387 R18E.1@15.939,145.812 ; R18E.1@15.971,145.812 15.971,148.671 16.4,149.1 19.6,149.1 20.014,148.686 20.014,146.372 20.014,142.621 18.851,141.459 Q3E.1@18.851,141.409
NetQ3E_2: Q3E.2 R20E.2 | length 2.5
  Bottom Layer w0.3: Q3E.2@16.951,141.409 16.951,140.112 17.376,139.687 R20E.2@18.014,139.687
NetQ3F_1: Q3F.1 R18F.1 R19F.2 | length 18.1
  Bottom Layer w0.3: R19F.2@15.182,168.235 R19F.2@15.349,168.402 ; R19F.2@15.234,168.183 R19F.2@14.459,168.183 14.678,168.402 R19F.2@15.349,168.402 ; R18F.1@15.943,170.805 15.518,170.38 15.518,168.571 R19F.2@15.349,168.402 ; R18F.1@15.975,170.805 15.975,172.696 16.579,173.3 19.6,173.3 20.2,172.7 20.2,167.797 18.856,166.452 Q3F.1@18.856,166.402
NetQ3F_2: Q3F.2 R20F.2 | length 2.5
  Bottom Layer w0.3: Q3F.2@16.956,166.402 16.956,165.105 17.381,164.68 R20F.2@18.018,164.68
NetQ4A_1: Q4A.1 R21A.2 | length 2
  Bottom Layer w0.3: Q4A.1@13.553,11.323 13.6,11.276 R21A.2@13.6,9.3
NetQ4A_3: Q4A.3 R19A.1 | length 3.4
  Bottom Layer w0.3: R19A.1@14.453,14.831 15.128,14.831 15.553,14.406 Q4A.3@15.553,12.273
NetQ4B_1: Q4B.1 R21B.2 | length 2
  Bottom Layer w0.3: Q4B.1@13.553,36.326 13.6,36.279 R21B.2@13.6,34.303
NetQ4B_3: Q4B.3 R19B.1 | length 3.4
  Bottom Layer w0.3: R19B.1@14.453,39.834 15.128,39.834 15.553,39.409 Q4B.3@15.553,37.276
NetQ4C_1: Q4C.1 R21C.2 | length 2
  Bottom Layer w0.3: Q4C.1@13.541,74.12 13.588,74.073 R21C.2@13.588,72.097
NetQ4C_3: Q4C.3 R19C.1 | length 3.4
  Bottom Layer w0.3: R19C.1@14.441,77.628 15.116,77.628 15.541,77.203 Q4C.3@15.541,75.07
NetQ4D_1: Q4D.1 R21D.2 | length 2
  Bottom Layer w0.3: Q4D.1@13.558,99.124 13.604,99.077 R21D.2@13.604,97.101
NetQ4D_3: Q4D.3 R19D.1 | length 3.4
  Bottom Layer w0.3: R19D.1@14.458,102.632 15.133,102.632 15.558,102.207 Q4D.3@15.558,100.074
NetQ4E_1: Q4E.1 R21E.2 | length 2
  Bottom Layer w0.3: Q4E.1@13.554,136.932 13.601,136.885 R21E.2@13.601,134.909
NetQ4E_3: Q4E.3 R19E.1 | length 3.4
  Bottom Layer w0.3: R19E.1@14.454,140.44 15.129,140.44 15.554,140.015 Q4E.3@15.554,137.882
NetQ4F_1: Q4F.1 R21F.2 | length 2
  Bottom Layer w0.3: Q4F.1@13.559,161.925 13.606,161.878 R21F.2@13.606,159.902
NetQ4F_3: Q4F.3 R19F.1 | length 3.4
  Bottom Layer w0.3: R19F.1@14.459,165.433 15.134,165.433 15.559,165.008 Q4F.3@15.559,162.875
NetQ5A_1: Q5A.1 R23A.2 | length 2.1
  Bottom Layer w0.3: R23A.2@8.197,71.839 8.197,70.589 8.497,70.289 8.497,70.239 8.747,69.989 Q5A.1@8.797,69.989
NetQ5B_1: Q5B.1 R23B.2 | length 2.1
  Bottom Layer w0.3: R23B.2@8.197,79.1 8.197,77.85 8.497,77.55 8.497,77.5 8.747,77.25 Q5B.1@8.797,77.25
NetQ5C_1: Q5C.1 R23C.2 | length 2.1
  Bottom Layer w0.3: R23C.2@8.197,86.408 8.197,85.158 8.497,84.858 8.497,84.808 8.747,84.558 Q5C.1@8.797,84.558
NetQ5D_1: Q5D.1 R23D.2 | length 2.1
  Bottom Layer w0.3: R23D.2@8.197,93.738 8.197,92.488 8.497,92.188 8.497,92.138 8.747,91.888 Q5D.1@8.797,91.888
NetQ5E_1: Q5E.1 R23E.2 | length 2.1
  Bottom Layer w0.3: R23E.2@8.197,100.895 8.197,99.645 8.497,99.345 8.497,99.295 8.747,99.045 Q5E.1@8.797,99.045
NetQ5F_1: Q5F.1 R23F.2 | length 2.1
  Bottom Layer w0.3: R23F.2@40.297,67.631 40.297,66.381 40.597,66.081 40.597,66.031 40.847,65.781 Q5F.1@40.897,65.781
NetQ5G_1: Q5G.1 R23G.2 | length 1.9
  Bottom Layer w0.3: Q5G.1@50.997,68.712 51.097,68.812 R23G.2@51.097,70.562
NetQ5H_1: Q5H.1 R23H.2 | length 2.1
  Bottom Layer w0.3: R23H.2@50.397,77.816 50.397,76.566 50.697,76.266 50.697,76.216 50.947,75.966 Q5H.1@50.997,75.966
NetQ5I_1: Q5I.1 R23I.2 | length 2.1
  Bottom Layer w0.3: R23I.2@50.397,96.405 50.397,95.155 50.697,94.855 50.697,94.805 50.947,94.555 Q5I.1@50.997,94.555
NetQ5J_1: Q5J.1 R23J.2 | length 2.1
  Bottom Layer w0.3: R23J.2@50.497,103.741 50.497,102.491 50.797,102.191 50.797,102.141 51.047,101.891 Q5J.1@51.097,101.891
NetQ6A_1: Q6A.1 R25A.2 | length 4.1
  Bottom Layer w0.3: R25A.2@25.806,18.806 25.8,18.8 25.4,18.8 24.9,18.3 24.9,16.367 25.061,16.206 Q6A.1@25.856,16.206
NetQ6A_3: Q6A.3 R24A.1 | length 1.8
  Bottom Layer w0.3: R24A.1@26.2,12.4 26.2,13.1 26.617,13.517 Q6A.3@26.617,14.017
NetQ6B_1: Q6B.1 R25B.2 | length 4.2
  Bottom Layer w0.3: R25B.2@25.799,43.805 25.226,43.805 24.9,43.478 24.9,41.366 25.061,41.205 Q6B.1@25.849,41.205
NetQ6B_3: Q6B.3 R24B.1 | length 1.8
  Bottom Layer w0.3: R24B.1@26.193,37.399 26.193,38.099 26.61,38.516 Q6B.3@26.61,39.016
NetQ6C_1: Q6C.1 R25C.2 | length 4.4
  Bottom Layer w0.3: Q6C.1@25.86,78.971 25.854,78.977 25.061,78.977 24.9,79.138 24.9,81.2 25.277,81.577 25.816,81.577 R25C.2@26.016,81.777
NetQ6C_3: Q6C.3 R24C.1 | length 2
  Bottom Layer w0.3: R24C.1@26.21,75.171 26.21,75.871 26.627,76.288 26.627,76.788 Q6C.3@26.81,76.971
NetQ6D_1: Q6D.1 R25D.2 | length 4
  Bottom Layer w0.3: R25D.2@25.804,106.602 25.798,106.596 25.496,106.596 24.9,106 24.9,104.163 25.061,104.002 Q6D.1@25.854,104.002
NetQ6D_3: Q6D.3 R24D.1 | length 1.8
  Bottom Layer w0.3: R24D.1@26.198,100.196 26.198,100.896 26.615,101.313 Q6D.3@26.615,101.813
NetQ6E_1: Q6E.1 R25E.2 | length 4.2
  Bottom Layer w0.3: R25E.2@25.808,144.405 25.802,144.399 25.399,144.399 24.8,143.8 24.8,142 24.995,141.805 Q6E.1@25.858,141.805
NetQ6E_3: Q6E.3 R24E.1 | length 1.8
  Bottom Layer w0.3: R24E.1@26.202,137.999 26.202,138.699 26.619,139.116 Q6E.3@26.619,139.616
NetQ6F_1: Q6F.1 R25F.2 | length 4.6
  Bottom Layer w0.3: R25F.2@25.807,169.403 25.224,169.403 24.863,169.041 24.846,169.041 24.607,168.803 24.607,166.964 24.768,166.803 Q6F.1@25.857,166.803
NetQ6F_3: Q6F.3 R24F.1 | length 1.8
  Bottom Layer w0.3: R24F.1@26.201,162.997 26.201,163.697 26.618,164.114 Q6F.3@26.618,164.614
NetQ7A_1: Q7A.1 R27A.2 | length 1.5
  Bottom Layer w0.3: Q7A.1@32,60.05 32.025,60.025 33.475,60.025 R27A.2@33.5,60
NetQ7B_1: Q7B.1 R27B.2 | length 1.8
  Bottom Layer w0.3: Q7B.1@32.025,122.825 Q7B.1@32,122.85 32.85,122.85 33.4,122.3 R27B.2@33.5,122.3 R27B.2@33.475,122.325
NetR6_1: R6.1 R7.2 | length 2.4
  Bottom Layer w0.3: R6.1@9.5,146.1 9.5,145.3 10,144.8 R7.2@10.9,144.8
NetR26A_1: R26A.1 V2A.1 | length 3.5
  Bottom Layer w0.3: V2A.1@27.5,57.4 27.5,57.348 28.45,56.398 28.45,54.925 R26A.1@28.875,54.5
NetR26B_1: R26B.1 V2B.1 | length 3.5
  Bottom Layer w0.3: V2B.1@27.5,120.2 27.5,120.148 28.45,119.198 28.45,117.725 R26B.1@28.875,117.3
RDPA: V1A.RDP
RDPB: V1B.RDP
RDPC: V1C.RDP
RDPD: V1D.RDP
RDPE: V1E.RDP
RDPF: V1F.RDP
T_JTDI: J4.10
T_L_SW_0: R25A.1 R25B.1 U2.18 | length 125.2
  Top Layer w0.2: 22.4,44.8 23.9,43.3 ; 25.1,21.5 25.7,19.9 ; 25.1,33.9 25.657,35.385
  Top Layer w0.3: v1(16.8,48.657) 16.8,70.5 14.9,72.4 14.9,85.4 15.466,85.966 18.266,85.966 19.8,87.5 19.8,92.952 16.952,95.8 15.7,95.8 15,96.5 15,97.5 15.4,97.9 15.4,108.1 21.6,114.3 v1(21.6,118.6) ; v1(21.4,45.8) 22.4,44.8 ; 23.9,43.3 26.8,43.3 v1(27.1,43) 25.725,41.625 25.725,35.453 25.657,35.385 ; 25.1,21.5 25.1,33.9 ; 25.7,19.9 25.7,19.4 v1(27.1,18)
  Bottom Layer w0.3: v1(16.8,48.657) 20.443,48.657 21.4,47.7 v1(21.4,45.8) ; U2.18@19.9,119.7 19.9,118.761 20.061,118.6 v1(21.6,118.6) ; R25B.1@25.993,42.599 26.699,42.599 v1(27.1,43) ; R25A.1@26,17.6 26.7,17.6 v1(27.1,18)
T_L_SW_1: R25C.1 R25D.1 U2.19 | length 74.5
  Top Layer w0.2: v1(21.98,82.921) 23.722,81.322
  Top Layer w0.3: v1(17.8,86.7) 18.981,87.881 18.981,92.419 16.5,94.9 15.2,94.9 14.1,96 14.1,98.1 v1(14.7,98.7) 14.7,108.4 20.9,114.6 v1(20.9,117.8) ; 23.722,81.322 24.244,80.8 v1(27.1,80.8) ; v1(24.989,100.189) 24.989,103.689 v1(27.1,105.8)
  Bottom Layer w0.2: 22.4,98.5 23.844,99.755
  Bottom Layer w0.3: v1(14.7,98.7) 15.329,98.071 16.029,98.071 16.6,97.5 21.4,97.5 22.4,98.5 ; v1(17.8,86.7) 20.781,86.7 21.6,85.881 21.6,83.301 v1(21.98,82.921) ; U2.19@19.1,119.7 19.1,118.6 19.9,117.8 v1(20.9,117.8) ; 23.844,99.755 24.29,100.2 24.979,100.2 v1(24.989,100.189) ; R25D.1@25.998,105.396 26.696,105.396 v1(27.1,105.8) ; R25C.1@26.01,80.371 26.21,80.571 26.79,80.571 27.019,80.8 v1(27.1,80.8)
T_L_SW_2: R25E.1 R25F.1 U2.21 | length 70.3
  Top Layer w0.2: 28.057,161.245 28.3,158.9 ; 28.064,136.254 28.3,134 ; 28.105,145.763 28.3,147.513
  Top Layer w0.3: v1(20.2,117.1) 20.2,118.2 20.7,118.7 20.7,123.2 19.3,124.6 19.3,127.67 24.03,132.4 27.7,132.4 28.3,133 28.3,134 ; v1(27.1,143.6) 28.105,143.6 ; v1(27.15,168.63) 27.18,168.6 28.6,168.6 29.3,167.9 29.3,162.5 28.057,161.257 28.057,161.245 ; 28.064,136.254 28.064,136.264 29.85,138.05 29.85,142.45 28.7,143.6 28.105,143.6 ; 28.105,145.763 28.105,143.6 ; 28.3,147.513 28.3,158.9
  Bottom Layer w0.3: U2.21@17.5,119.7 17.5,118.6 19,117.1 v1(20.2,117.1) ; R25F.1@26.001,168.197 26.717,168.197 v1(27.15,168.63) ; R25E.1@26.002,143.199 26.699,143.199 v1(27.1,143.6)
T_NRST: J4.12 U2.6 | length 31.5
  Top Layer w0.3: v1(5,111.1) 5,111.019 5.2,110.819 v1(5.2,107.8) ; v1(8.549,107.751) 8.549,108.249 15.6,115.3 15.6,123.85 v1(15.55,123.9)
  Bottom Layer w0.3: v1(5.2,107.8) 8.5,107.8 v1(8.549,107.751) ; v1(15.55,123.9) 15.6,123.9 19.052,127.352 19.052,128.052 U2.6@19.1,128.1
T_SWCLK: J4.6 U2.25 | length 15.2
  Top Layer w0.3: v1(5,114.9) 5.6,114.3 v1(12.7,114.3)
  Bottom Layer w0.3: v1(5,114.9) J4.6@5.03,114.9 ; v1(12.7,114.3) 12.7,119.6 13.686,120.586 13.686,121.086 U2.25@13.7,121.1
T_SWDIO: J4.4 U2.24 | length 18.8
  Top Layer w0.3: v1(5,116.2) 5,118.4 5.6,119 6.6,119 10.602,114.998 v1(14.2,114.998)
  Bottom Layer w0.3: v1(5,116.2) J4.4@5.03,116.17 ; v1(14.2,114.998) 14.2,119.4 14.5,119.7 U2.24@15.1,119.7
T_SWO: J4.8 | length 0
  Bottom Layer w0.3: J4.8@5.007,113.629 5.009,113.63 J4.8@5.03,113.63
T_VCP_RX: J4.13 U2.10 | length 28.8
  Top Layer w0.3: v1(20.6,124.4) 21.5,123.5 21.5,119.619 22.4,118.719 v1(22.4,114.9)
  Bottom Layer w0.3: J4.13@9.1,109.82 12.32,109.82 16.2,113.7 21.9,113.7 22.4,114.2 v1(22.4,114.9) ; v1(20.6,124.4) 20.6,125.5 21,125.9 U2.10@22.1,125.9
T_VCP_TX: J4.14 U2.9 | length 36.1
  Top Layer w0.3: v1(23.29,114.91) 23.233,114.967 23.233,115.577 23.05,115.76 23.05,120.318 22.927,120.441 22.927,125.927 v1(23.7,126.7)
  Bottom Layer w0.3: J4.14@5.03,109.82 5.03,108.97 5.2,108.8 12.4,108.8 16.65,113.05 22.25,113.05 23.29,114.09 v1(23.29,114.91) ; U2.9@22.1,126.7 v1(23.7,126.7)
pads on no net: J4.1 J4.2 J4.9 J4.NPTH1 J4.NPTH2

## Polygon pours and split planes (outlines as drawn)
GND on Top Layer "TOP_GND" (solid, remove dead copper, pour order 0): 10,0 45,0 ccw(c45,10) 55,10 55,171 ccw(c45,171) 45,181 10,181 ccw(c10,171) 0,171 0,10 ccw(c10,10)
GND on Bottom Layer "NONET_L-01_P-001" (solid, remove dead copper, pour order 7): 45,0 45,39.394 54.994,39.394 54.998,9.992 cw(c45.008,9.991)
GND on Bottom Layer "NONET_L-01_P-001" (solid, remove dead copper, pour order 6): 45,180.592 45,39.394 54.994,39.394 55,39.4 55,180.6
+100V on Bottom Layer "+100V_Poly" (solid, remove dead copper, pour order 2): 52.177,20.201 46.829,20.201 46.829,24.72 52.177,24.72
+HV on Bottom Layer "+HV_Poly" (solid, pour order 1): 52.18,12.581 46.829,12.581 46.829,17.1 52.18,17.1
+3V3 on Bottom Layer "+3V3_Poly" (solid, remove dead copper, pour order 3): 52.18,27.821 46.829,27.821 46.829,32.35 52.181,32.35
GND on Bottom Layer "BOTTOM_GND" (solid, remove dead copper, pour order 5): 10,0 45.3,0 45.3,181 10,181 ccw(c10,171) 0,171 0,10 ccw(c10,10)

## Silkscreen, mask and mechanical layers (free items; w line width, h text height)
Mechanical 1:
  drawing of 258 lines, arcs and shapes, not listed
  text "Layer" at 69.094,180.498 h1.52
  text "Name" at 79.506,180.498 h1.52
  text "Material" at 113.278,180.498 h1.52
  text "Thickness" at 130.038,180.498 h1.52
  text "Constant" at 146.544,180.498 h1.52
  text "Board Layer Stack" at 161.018,180.498 h1.52
  text "Top Overlay" at 79.506,177.45 h1.52
  text "Top Solder" at 79.506,174.402 h1.52
  text "SM-001" at 113.278,174.402 h1.52
  text "0.010mm" at 130.038,174.402 h1.52
  text "4" at 146.544,174.402 h1.52
  text "Top Surface Finish" at 79.506,171.354 h1.52
  text "Lead-Free" at 113.278,171.354 h1.52
  text "0.020mm" at 130.038,171.354 h1.52
  text "1" at 69.094,168.306 h1.52
  text "Top Layer" at 79.506,168.306 h1.52
  text "CF-004" at 113.278,168.306 h1.52
  text "0.035mm" at 130.038,168.306 h1.52
  text "Dielectric 1" at 79.506,165.258 h1.52
  text "FR4" at 113.278,165.258 h1.52
  text "1.500mm" at 130.038,165.258 h1.52
  text "4.3" at 146.544,165.258 h1.52
  text "2" at 69.094,162.21 h1.52
  text "Bottom Layer" at 79.506,162.21 h1.52
  text "CF-004" at 113.278,162.21 h1.52
  text "0.035mm" at 130.038,162.21 h1.52
  text "Bottom Surface Finish" at 79.506,159.162 h1.52
  text "Lead-Free" at 113.278,159.162 h1.52
  text "0.020mm" at 130.038,159.162 h1.52
  text "Bottom Solder" at 79.506,156.114 h1.52
  text "SM-001" at 113.278,156.114 h1.52
  text "0.010mm" at 130.038,156.114 h1.52
  text "4" at 146.544,156.114 h1.52
  text "Bottom Overlay" at 79.506,153.066 h1.52
Drill Drawing:
  circle w0.254: c2.393,190.437 r0.847
  lines w0.254: 1.546,193.823 1.969,193.823 1.969,193.4 2.816,193.4 2.816,193.823 3.239,193.823 3.239,194.67 2.816,194.67 2.816,195.093 1.969,195.093 1.969,194.67 1.546,194.67 1.546,193.823 ; 1.546,197.21 3.239,197.21 3.239,198.903 1.546,198.903 1.546,197.21 ; 1.546,201.443 1.969,201.443 2.393,201.02 2.816,201.443 3.239,201.443 2.816,201.867 3.239,202.29 2.816,202.29 2.393,202.713 1.969,202.29 1.546,202.29 1.969,201.867 1.546,201.443 ; 1.546,204.83 2.393,205.253 3.239,204.83 2.816,205.677 3.239,206.523 2.393,206.1 1.546,206.523 1.969,205.677 1.546,204.83
  lines w0.381: 0.027,188.447 187.733,188.447 ; 0.027,207.497 187.733,207.497 ; 14.02,184.637 14.02,211.307 ; 29.256,184.637 29.256,211.307 ; 58.457,184.637 58.457,211.307 ; 71.306,184.637 71.306,211.307 ; 89.945,184.637 89.945,211.307 ; 128.033,184.637 128.033,211.307 ; 143.016,184.637 143.016,211.307 ; 161.959,184.637 161.959,211.307 ; 0.027,184.637 187.733,184.637 187.733,211.307 0.027,211.307 0.027,184.637
  text "Symbol" at 2.313,208.64 h1.83
  text "Count" at 15.163,208.64 h1.83
  text "Hole Size" at 30.399,208.64 h1.83
  text "Plated" at 59.6,208.64 h1.83
  text "Hole Type" at 72.449,208.64 h1.83
  text "Drill Layer Pair" at 91.088,208.64 h1.83
  text "Via/Pad" at 129.176,208.64 h1.83
  text "Pad Shape" at 144.159,208.64 h1.83
  text "Template" at 163.102,208.64 h1.83
  text "541" at 15.163,204.83 h1.52
  text "0.300mm (11.81mil)" at 30.399,204.83 h1.52
  text "PTH" at 59.6,204.83 h1.52
  text "Round" at 72.449,204.83 h1.52
  text "Top Layer - Bottom Layer" at 91.088,204.83 h1.52
  text "Via" at 129.176,204.83 h1.52
  text "Rounded" at 144.159,204.83 h1.52
  text "v60h30" at 163.102,204.83 h1.52
  text "2" at 15.163,201.02 h1.52
  text "1.020mm (40.16mil)" at 30.399,201.02 h1.52
  text "NPTH" at 59.6,201.02 h1.52
  text "Round" at 72.449,201.02 h1.52
  text "Top Layer - Bottom Layer" at 91.088,201.02 h1.52
  text "Pad" at 129.176,201.02 h1.52
  text "Rounded" at 144.159,201.02 h1.52
  text "c102hn102m102p0" at 163.102,201.02 h1.52
  text "82" at 15.163,197.21 h1.52
  text "1.400mm (55.12mil)" at 30.399,197.21 h1.52
  text "PTH" at 59.6,197.21 h1.52
  text "Round" at 72.449,197.21 h1.52
  text "Top Layer - Bottom Layer" at 91.088,197.21 h1.52
  text "Pad" at 129.176,197.21 h1.52
  text "Rounded" at 144.159,197.21 h1.52
  text "r160_240h140r80" at 163.102,197.21 h1.52
  text "8" at 15.163,193.4 h1.52
  text "2.500mm (98.43mil)" at 30.399,193.4 h1.52
  text "PTH" at 59.6,193.4 h1.52
  text "Round" at 72.449,193.4 h1.52
  text "Top Layer - Bottom Layer" at 91.088,193.4 h1.52
  text "Pad" at 129.176,193.4 h1.52
  text "Rounded" at 144.159,193.4 h1.52
  text "c400h250" at 163.102,193.4 h1.52
  text "1" at 15.163,189.59 h1.52
  text "8.000mm (314.96mil)" at 30.399,189.59 h1.52
  text "NPTH" at 59.6,189.59 h1.52
  text "Round" at 72.449,189.59 h1.52
  text "Top Layer - Bottom Layer" at 91.088,189.59 h1.52
  text "Pad" at 129.176,189.59 h1.52
  text "Rounded" at 144.159,189.59 h1.52
  text "c800hn800" at 163.102,189.59 h1.52
  text "634 Total" at 15.163,185.78 h1.52